# Altium PCB MADI_RP2040_PCB_L4.PcbDoc (part 3 of 3)
Units mm, origin at the board's own origin, x right, y up, seen from the top; angles counter-clockwise.
Board outline 30 x 21.59 mm, 4 copper layers (L1, L2 (GND), L3 (GND), L4), stack 1.525 mm thick; 53 components, 53 nets, 278 pads, 170 vias.
Unrouted connection lines stored in the file: 119.
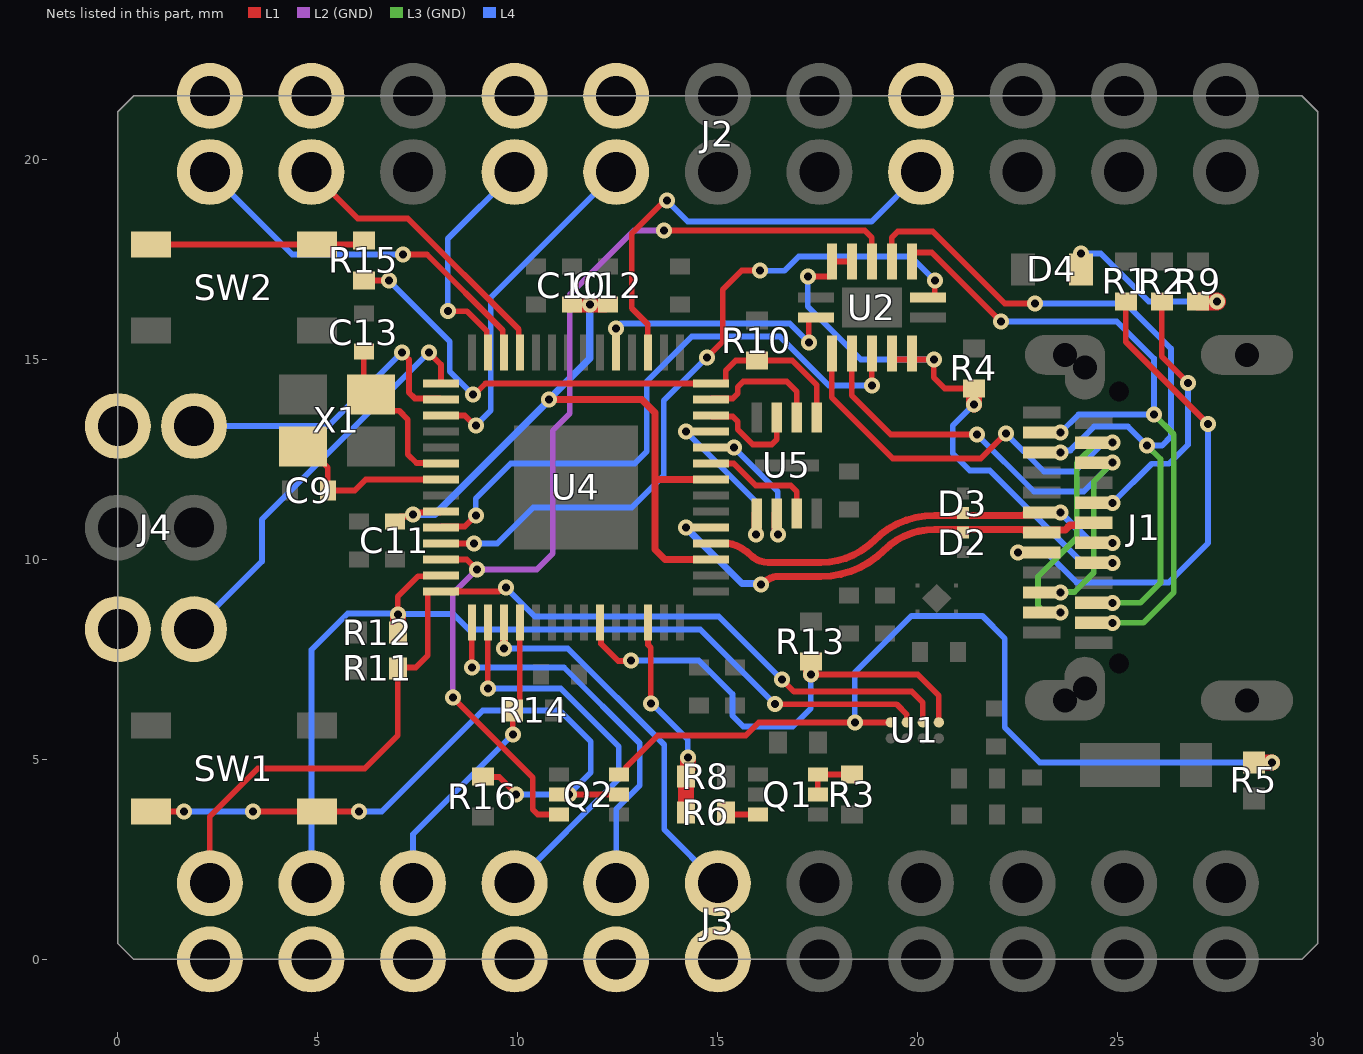
[diagram p4: the nets of this part, all layers, seen from the top]

## Via types
v1: diameter 0.4, hole 0.2, L1 to L4, tented both sides, 161 vias
v2: diameter 0.45, hole 0.2, L1 to L4, tented both sides, 9 vias

## Nets (pads, with @x,y where several pads share a name; then routed paths per layer and width w, separated by ;. In a path a pad name is that pad's centre, name@x,y a point inside that pad or via, vN(x,y) a via of type N, cw(c..) or ccw(c..) an arc to the next point about the centre after c; other vN are vias at no path point) (continued)
GPIO1: J2.4 U4.3 | length 11.4
  L1 w0.146: U4.3@13.25,15.175 13.25,15.881 12.85,16.281 12.85,18.15 13.675,18.975 v1(13.725,18.975)
  L4 w0.146: v1(13.725,18.975) 14.25,18.45 18.845,18.45 J2.4@20.08,19.685
GPIO10: J2.8 U4.13 | length 5.9
  L1 w0.146: v1(8.25,16.205) 8.73,16.205 9.223,15.712 9.223,15.202 U4.13@9.25,15.175
  L4 w0.146: v1(8.25,16.205) 8.25,18.015 J2.8@9.92,19.685
GPIO14: J2.7 U4.17 | length 8.8
  L1 w0.146: U4.17@8.075,13.6 8.675,13.6 8.925,13.35 v1(8.95,13.35)
  L4 w0.146: v1(8.95,13.35) 9.325,13.725 9.325,16.55 J2.7@12.46,19.685
I2C0_SCL: J3.11 R11.1 U1.B1 U4.28 | length 25.5
  L1 w0.146: J3.11@2.3,1.905 2.3,3.575 3.5,4.775 6.175,4.775 7,5.6 R11.1@7,7.275 7.025,7.3 7.45,7.3 7.75,7.6 7.75,9.173 7.777,9.2 U4.28@8.075,9.2 9.531,9.2 9.631,9.3 v1(9.7,9.3) ; v1(16.6,7) 16.901,6.7 19.85,6.7 20.125,6.425 U1.B1@20.125,5.925
  L4 w0.146: v1(9.7,9.3) 10.425,8.575 15.025,8.575 v1(16.6,7)
I2C0_SDA: J3.10 R12.1 U1.C1 U4.27 | length 24.5
  L1 w0.146: v1(7,8.625) 7,9.075 7.504,9.579 7.95,9.579 U4.27@7.971,9.6 ; v1@16.425,6.375 v1(16.43,6.38) 19.47,6.38 19.725,6.125 U1.C1@19.725,5.925
  L1 w0.4: R12.1@7,8.175 v1(7,8.625)
  L4 w0.146: J3.10@4.84,1.905 4.84,7.74 5.75,8.65 6.975,8.65 v1(7,8.625) ; v1@6.988,8.638 8.387,8.638 8.775,8.25 14.56,8.25 v1(16.43,6.38)
MR: Q2.6 R5.2 U1.D1 | length 22.9
  L1 w0.146: Q2.6@12.525,4.625 12.6,4.625 12.702,4.727 12.702,4.802 13.5,5.6 15.7,5.6 16.025,5.925 v1(18.425,5.925) U1.D1@19.325,5.925
  L1 w0.4: R5.2@28.4,4.925 v1(28.85,4.925)
  L4 w0.146: v1(18.425,5.925) 18.425,7.172 19.842,8.589 21.611,8.589 22.175,8.025 22.175,5.8 23.05,4.925 v1(28.85,4.925)
NetC9_1: C9.1 U4.21 X1.1 | length 4.6
  L1 w0.146: X1.1@4.775,12.675 X1.1@4.625,12.825 4.725,12.825 5.25,12.3 C9.1@5.25,11.725 5.925,11.725 6.2,12 U4.21@8.075,12
NetC10_2: C10.2 C11.2 C12.2 U4.23 U4.45 U4.50 | length 18.5
  L1 w0.146: C11.2@6.925,10.95 7.052,11.077 7.326,11.076 v1(7.375,11.125) 7.423,11.173 8.048,11.173 U4.23@8.075,11.2
  L1 w0.18: v1(10.775,14) 13.1,14 13.43,13.67 13.43,12 ; U4.45@14.825,10 13.68,10 13.43,10.25 13.43,12 ; U4.50@14.825,12 13.43,12
  L1 w0.4: C10.2@11.425,16.375 C12.2@12.175,16.375
  L4 w0.18: v1(7.375,11.125) 7.925,11.125 10.775,13.975 v1(10.775,14) 11.8,15.025 v1(11.8,16.375)
NetC13_1: C13.1 U4.20 X1.3 | length 4.1
  L1 w0.146: C13.1@6.15,15.2 6.15,14.3 X1.3@6.325,14.125 ; X1.3@6.325,14.025 6.635,13.715 7.035,13.715 7.25,13.5 7.25,12.625 7.465,12.41 8.065,12.41 U4.20@8.075,12.4
NetD4_A: D4.A R9.2 | length 4.2
  L1 w0.45: R9.2@27,16.45 v1(27.475,16.45)
  L4 w0.146: v1(24.075,17.65) 24.575,17.65 25.775,16.45 v1@27.35,16.45
NetJ1_A5: J1.A5 R1.2 | length 12.4
  L1 w0.146: R1.2@25.2,16.45 25.2,15.441 27.251,13.39 v1(27.256,13.39)
  L4 w0.146: v1(22.506,10.17) 23.226,10.17 23.971,9.425 26.275,9.425 27.256,10.406 v1(27.256,13.39)
NetJ1_B5: J1.B5 R2.2 | length 6.3
  L1 w0.146: R2.2@26.1,16.45 26.1,15.071 v1(26.756,14.415)
  L4 w0.146: v1(24.87,11.415) 25.845,12.39 26.281,12.39 26.756,12.865 v1(26.756,14.415)
NetQ1_3: Q1.3 R6.2 | length 0.8
  L1 w0.146: R6.2@15.2,3.675 15.25,3.625 Q1.3@16,3.625
NetQ1_5: Q1.5 Q1.6 R3.1 | length 1.3
  L1 w0.146: Q1.5@17.5,4.125 Q1.6@17.5,4.625 R3.1@18.35,4.625
NetQ2_2: Q2.2 Q2.5 R16.2 SW1.1 SW1.2 | length 17.5
  L1 w0.146: SW1.2@0.825,3.7 v1(1.65,3.7) ; v1(3.375,3.7) SW1.1@4.975,3.7 v1(6.025,3.7) ; R16.2@9.125,4.575 9.137,4.563 9.537,4.563 9.95,4.15 v1(9.95,4.125) ; v1(11.275,4.125) Q2.5@12.525,4.125
  L4 w0.146: v1(1.65,3.7) v1(3.375,3.7) ; v1(6.025,3.7) 6.6,3.7 9.125,6.225 11.05,6.225 11.825,5.45 11.825,4.675 v1(11.275,4.125) v1(9.95,4.125)
NetR15_2: R15.2 SW2.1 SW2.2 | length 5.4
  L1 w0.146: SW2.1@0.825,17.875 SW2.2@4.975,17.875 6.05,17.875 R15.2@6.15,17.975
nIRQ_BQ: R13.1 U1.A1 U4.37 | length 12.4
  L1 w0.146: U4.37@12.05,8.425 12.077,8.398 12.077,7.892 12.509,7.46 12.81,7.46 v1(12.825,7.475) ; v1(17.325,7.125) 20,7.125 20.525,6.6 U1.A1@20.525,5.925
  L1 w0.4: v1(17.325,7.125) R13.1@17.325,7.45
  L4 w0.146: v1(12.825,7.475) 14.525,7.475 15.363,6.637 15.363,6.099 15.638,5.825 16.875,5.825 17.325,6.275 v1(17.325,7.125)
nRESET_SW: J1.A10 J1.B10 U2.3 | length 19.3
  L1 w0.146: U2.3@19.35,17.45 19.35,18.05 19.5,18.2 20.375,18.2 22.175,16.4 v1(22.925,16.4)
  L3 (GND) w0.146: v1(24.87,8.915) 25.565,8.915 26.066,9.416 26.066,12.51 v1(25.731,12.845)
  L4 w0.146: v1(22.925,16.4) 25.2,16.4 26.326,15.274 26.326,13.064 26.106,12.845 v1(25.731,12.845) 25.256,13.32 24.406,13.32 23.813,12.727 23.622,12.727 v1(23.57,12.675)
QSPI_DATA0: U4.53 U5.5 | length 3.8
  L1 w0.254: v1(15.95,10.625) 15.975,10.65 U5.5@15.975,11.15
  L4 w0.146: v1(14.2,13.2) 15,12.4 15.95,11.45 v1(15.95,10.625)
QSPI_DATA1: U4.55 U5.2 | length 3.2
  L1 w0.146: U4.55@14.825,14 14.85,14.025 15.375,14.025 15.5,14.15 15.5,14.312 15.638,14.45 16.725,14.45 16.975,14.2 U5.2@16.975,13.55
QSPI_DATA2: U4.54 U5.3 | length 2.7
  L1 w0.146: U4.54@14.825,13.6 14.85,13.575 15.375,13.575 15.5,13.45 15.5,13.25 15.875,12.875 16.35,12.875 16.475,13 U5.3@16.475,13.55
QSPI_DATA3: U4.51 U5.7 | length 3
  L1 w0.146: U4.51@14.825,12.4 15.4,12.4 15.95,11.85 16.825,11.85 16.975,11.7 U5.7@16.975,11.15
QSPI_nCS: R10.1 R15.1 U4.56 U5.1 | length 14.5
  L1 w0.146: R15.1@6.15,16.975 v1(6.775,16.975) ; v1(8.875,14.125) 8.917,14.125 9.193,14.4 15.175,14.4 15.2,14.425 15.2,14.725 15.45,14.975 R10.1@15.975,14.975 16.863,14.975 17.475,14.363 U5.1@17.475,13.55
  L4 w0.146: v1(6.775,16.975) 8.3,15.45 8.3,14.7 v1(8.875,14.125)
QSPI_SCK: U4.52 U5.6 | length 3.2
  L1 w0.254: U5.6@16.475,11.15 16.475,10.65 v1(16.5,10.625)
  L4 w0.146: v1(15.4,12.8) 16.5,11.7 v1(16.5,10.625)
RUN_RP: Q2.3 U2.4 U4.26 | length 26.4
  L1 w0.146: U4.26@8.075,10 8.725,10 v1(8.975,9.75) ; v1(8.375,6.55) 10.375,4.55 10.375,3.75 10.5,3.625 Q2.3@11.025,3.625 ; v1(13.65,18.225) 18.675,18.225 18.85,18.05 U2.4@18.85,17.45
  L2 (GND) w0.146: v1(8.375,6.55) 8.375,9.15 v1(8.975,9.75) 10.475,9.75 10.875,10.15 10.875,13.225 11.3,13.65 11.3,16.625 12.9,18.225 v1(13.65,18.225)
SPI0_MISO: J3.6 U4.31 | length 9.7
  L1 w0.2: v1(9.65,7.775) U4.31@9.65,8.425
  L4 w0.146: v1(9.65,7.775) 11.25,7.775 13.659,5.366 13.659,3.246 J3.6@15,1.905
SPI0_MOSI: J3.8 U4.30 | length 10.2
  L1 w0.146: v1(9.25,6.775) U4.30@9.25,8.425
  L4 w0.146: v1(9.25,6.775) 11.075,6.775 12.525,5.325 12.525,4.51 J3.8@9.92,1.905 J3.8@10.054,1.905
SPI0_nCS: J3.9 R14.1 U4.32 | length 7.6
  L1 w0.146: v1(9.875,5.625) 9.875,6.2 R14.1@9.9,6.225 ; R14.1@9.875,6.225 9.875,6.275 10.05,6.45 U4.32@10.05,8.425
  L4 w0.146: J3.9@7.38,1.905 7.38,3.13 v1(9.875,5.625)
SPI0_SCK: J3.7 U4.29 | length 9.9
  L1 w0.146: v1(8.85,7.3) U4.29@8.85,8.425
  L4 w0.146: v1(8.85,7.3) 11.153,7.3 13.05,5.403 13.05,4.35 12.46,3.76 J3.7@12.46,1.905
SW_CONTROL: J1.B8 R4.2 U2.5 U2.6 U2.12 U2.13 | length 15.7
  L1 w0.146: v1(17.25,17.075) 17.8,17.075 17.85,17.125 U2.6@17.85,17.175 ; U2.6@17.85,17.238 U2.6@17.85,17.45 U2.5@18.35,17.45 ; U2.12@19.35,15.15 19.35,15.05 19.4,15 19.8,15 U2.13@19.85,15.05 ; U2.13@19.85,15.15 U2.13@19.85,15.05 ; R4.2@21.4,14.275 20.675,14.275 20.4,14.55 v1(20.4,15) 19.9,15 U2.13@19.85,15.05
  L1 w0.4: v1(21.4,13.875) R4.2@21.4,14.275
  L4 w0.146: v1(17.25,17.075) 17.25,16.325 18.575,15 v1(20.4,15) ; v1(21.4,13.875) 20.875,13.35 20.875,12.65 21.3,12.225 21.8,12.225 24.11,9.915 v1(24.87,9.915)
SWDCLK: U2.11 U4.24 | length 15.3
  L1 w0.146: U4.24@8.075,10.8 8.1,10.825 8.675,10.825 v1(8.95,11.1) ; v1(18.85,14.35) U2.11@18.85,15.15
  L4 w0.146: v1(8.95,11.1) 8.95,11.525 9.825,12.4 12.925,12.4 13.225,12.7 13.225,14.45 14.35,15.575 16.55,15.575 17.775,14.35 v1(18.85,14.35)
SWDCLK_SW: J1.A3 J1.B3 U2.10 | length 12.8
  L1 w0.146: U2.10@18.35,15.15 18.35,14.1 19.325,13.125 v1(21.475,13.125)
  L3 (GND) w0.146: v1(23.57,9.175) 23.579,9.184 23.92,9.184 24.4,9.664 24.4,11.945 v1@24.87,12.415
  L4 w0.146: v1(21.475,13.125) 22.903,11.697 24.147,11.697 v1(24.867,12.418)
SWDIO: U2.1 U4.25 | length 18
  L1 w0.146: U4.25@8.075,10.4 v1(8.9,10.4) ; v1(14.725,15.05) 15.125,15.45 15.125,16.75 15.6,17.225 v1(16.05,17.225) ; U2.1@20.25,16.55 20.375,16.55 20.425,16.6 v1(20.425,16.975)
  L4 w0.146: v1(8.9,10.4) 9.484,10.4 10.384,11.3 12.85,11.3 13.65,12.1 13.65,13.975 v1(14.725,15.05) ; v1(16.05,17.225) 16.058,17.217 16.667,17.217 17.025,17.575 19.825,17.575 v1(20.425,16.975)
SWDIO_SW: J1.A11 J1.B11 U2.2 | length 17.8
  L1 w0.146: U2.2@19.85,17.45 19.85,17.625 19.9,17.675 20.35,17.675 v1(22.075,15.95)
  L3 (GND) w0.146: v1(24.87,8.415) 25.64,8.415 26.4,9.175 26.4,13.126 v1(25.906,13.62)
  L4 w0.146: v1(22.075,15.95) 24.975,15.95 25.906,15.019 ; v1(23.57,13.175) 24.015,13.62 v1(25.906,13.62) 25.906,15.03
SWO: U2.8 U4.5 | length 5.7
  L1 w0.146: v1(17.275,15.425) 17.275,16.025 U2.8@17.3,16.05
  L4 w0.146: v1(12.45,15.775) 12.575,15.9 16.8,15.9 v1(17.275,15.425)
SWO_SW: J1.A2 J1.B2 U2.9 | length 15.4
  L1 w0.146: U2.9@17.85,15.15 17.85,14.05 19.375,12.525 21.575,12.525 v1(22.2,13.15)
  L3 (GND) w0.146: v1(23.57,8.675) 23.176,8.675 23.006,8.845 23.006,9.57 23.975,10.539 23.975,12.414 24.481,12.92 24.865,12.92 v1@24.87,12.915
  L4 w0.146: v1(22.2,13.15) 23.153,12.197 23.922,12.197 24.604,12.879 24.829,12.879 v1(24.867,12.918)
UART0_RX: J4.3 U4.16 | length 7.9
  L1 w0.147: v1(7.1,15.175) 7.275,15 7.275,14.175 7.423,14.027 8.048,14.027 U4.16@8.075,14
  L4 w0.146: J4.3@1.905,13.335 5.26,13.335 v1(7.1,15.175)
UART0_TX: J4.1 U4.15 | length 10.7
  L1 w0.147: v1(7.775,15.175) 8.075,14.875 U4.15@8.075,14.4
  L4 w0.146: J4.1@1.225,8.35 J4.1@1.55,8.675
  L4 w0.147: J4.1@1.905,8.255 3.6,9.95 3.6,11 v1(7.775,15.175)
UART1_RX: J2.11 U4.12 | length 9.5
  L1 w0.146: v1(7.13,17.625) 7.729,17.625 9.623,15.731 9.623,15.202 U4.12@9.65,15.175
  L4 w0.146: J2.11@2.3,19.685 4.36,17.625 v1(7.13,17.625)
UART1_TX: J2.10 U4.11 | length 7.4
  L1 w0.146: J2.10@4.84,19.685 6,18.525 7.25,18.525 10.023,15.752 10.023,15.202 U4.11@10.05,15.175
USB_D_N: D3.1 J1.A7 J1.B7 U4.46 | length 10.4
  L1 w0.18: U4.46@14.825,10.4 15.198,10.4 cw(c15.198,9.743) 15.45,10.35 cw(c14.977,9.208) 15.849,10.084 ccw(c15.975,10.213) 15.854,10.08 ccw(c16.256,10.525) 15.885,10.053 ccw(c16.256,10.525) 16.257,9.925 17.581,9.925 ccw(c17.581,11.794) 18.903,10.472 cw(c20.417,8.958) 20.417,11.1 22.615,11.1 22.627,11.113 23.038,11.113 J1.A7@23.1,11.175
  L4 w0.18: v1(23.57,11.175) 24.33,10.415 v1(24.87,10.415)
USB_D_P: D2.1 J1.A6 J1.B6 U4.47 | length 11.3
  L1 w0.18: v1(16.075,9.375) cw(c16.188,9.235) 16.108,9.396 16.152,9.418 ccw(c16.072,9.579) 16.193,9.447 cw(c16.519,9.096) 16.519,9.575 17.581,9.575 ccw(c17.581,11.794) 19.15,10.225 cw(c20.417,8.958) 20.417,10.75 20.445,10.75 20.6,10.75 22.615,10.75 22.627,10.737 23.038,10.737 J1.A6@23.1,10.675 23.162,10.737 23.684,10.737 23.799,10.853 24.338,10.853 J1.B6@24.4,10.915
  L4 w0.18: v1(14.2,10.8) 15.605,9.395 16.055,9.395 v1(16.075,9.375)
VBAT_MON: R6.1 R8.2 U4.40 | length 5.2
  L1 w0.146: U4.40@13.25,8.425 13.259,8.416 13.259,7.866 13.325,7.8 v1(13.325,6.4)
  L1 w0.4: R6.1@14.2,3.625 14.2,4.525 14.225,4.55 14.225,4.767 14.25,4.792 v1@14.25,5
  L4 w0.146: v1(13.325,6.4) 13.35,6.4 14.25,5.5 v1(14.25,5.05)
pads on no net: J1.0 J1.A8 U4.4 U4.6 U4.7 U4.8 U4.9 U4.14 U4.18 U4.34 U4.35 U4.41 U5.9

## Polygon pours and split planes (outlines as drawn)
NetC10_2 on L1 "NONET_L-01_P-001" (solid, remove dead copper, pour order 35): 13.675,12 13.45,11.775 13.45,12.225
+3V3 on L1 "NONET_L-01_P-001" (solid, remove dead copper, pour order 34): 10.45,9.625 10.225,9.85 10.675,9.85
+3V3 on L1 "NONET_L-01_P-001" (solid, remove dead copper, pour order 33): 9.3,11.6 9.525,11.825 9.525,11.35
NetC10_2 on L1 "NONET_L-01_P-001" (solid, remove dead copper, pour order 32): 6.675,10.75 6.675,11.15 6.825,11.3 8.525,11.3 8.525,11.1 7.65,11.1 7.3,10.75 7.175,10.75
+3V3 on L1 "NONET_L-01_P-001" (solid, remove dead copper, pour order 30): 0.325,5.525 5.475,5.525 6.225,6.275 6.225,8.45 5.65,8.45 5.375,8.725 5.375,10.5 5.625,10.75 6.275,10.75 6.375,10.85 6.375,11.225 6.65,11.5 8.525,11.5 8.525,11.7 6.325,11.7 5.775,11.15 5.325,11.15 4.675,10.5 4.675,6.65 4.2,6.175 0.325,6.175
+3V3 on L1 "NONET_L-01_P-001" (solid, remove dead copper, pour order 29): 14.125,11.7 13.95,11.525 13.95,11.225 14.075,11.1 15.45,11.1 15.6,11.25 15.6,11.55 15.45,11.7
+3V3 on L1 "NONET_L-01_P-001" (solid, remove dead copper, pour order 28): 20.265,9.37 20.265,9.48 19.92,9.825 19.345,9.825 18.82,9.3 17.5,9.3 17.1,8.9 15.675,8.9 15.275,9.3 15.275,9.7 13.6,9.7 13.5,9.6 13.95,9.15 13.95,7.975 14.275,7.65 14.275,7.1 15.675,7.1 15.675,7.875 16.025,8.225 17.6,8.225 17.6,8.475 18.025,8.9 19.795,8.9 20.115,9.22
GND on L1 "NONET_L-01_P-001" (solid, remove dead copper, pour order 27): 10.775,4.45 10.775,5.35 11.325,5.9 11.325,7.375 11.725,7.375 11.775,7.325 11.775,4.825 11.4,4.45 11.275,4.45
GND on L1 "NONET_L-01_P-001" (solid, remove dead copper, pour order 26): 4.025,13.625 3.825,13.825 3.825,16.125 4.3,16.6 5.65,16.6 6.3,15.95 5.9,15.95 5.475,15.525 5.475,15.4 5.225,15.15 5.225,13.625
GND on L1 "NONET_L-01_P-001" (solid, remove dead copper, pour order 25): 5.775,10.2 5.775,9.25 5.85,9.175 6.75,9.175 7.175,9.6 7.175,10.2
nIRQ_BQ on L1 "NONET_L-01_P-001" (solid, remove dead copper, pour order 17): 17.6,7.675 17.6,7.225 17.7,7.125 17.325,7.125 17.325,7.675
GND on L1 "NONET_L-01_P-001" (solid, remove dead copper, pour order 15): 20.306,8.488 20.306,7.985 20.265,7.944 19.875,8.334 19.875,8.83 19.912,8.83 20.475,9.393 20.843,9.025
GND on L1 "NONET_L-01_P-001" (solid, remove dead copper, pour order 13): 8.688,3.8 8.45,3.8 8.35,3.7 8.35,3 8.5,2.85 9.05,2.85 9.4,3.2 9.4,3.8
+VSYS on L1 "NONET_L-01_P-001" (solid, remove dead copper, pour order 12): 21.211,9.65 21.25,9.611 21.25,8.375 21.25,7.1 21.2,7.05 20.85,7.05 20.8,7.1 20.8,8.35 20.685,8.465 20.685,8.68 20.835,8.83 20.835,9.22 20.685,9.37 20.685,9.585 20.75,9.65
GND on L1 "NONET_L-01_P-001" (solid, remove dead copper, pour order 11): 18.025,8.35 18.025,7.675 18.27,7.43 20.25,7.43 20.25,7.93 20.265,7.944 20.265,8.68 20.115,8.83 19.875,8.83 19.875,8.488 19.737,8.35
+VBUS on L1 "NONET_L-01_P-001" (solid, remove dead copper, pour order 9): 23.938,9.567 23.93,9.56 23.93,9.262 25.267,9.262 25.95,8.58 25.95,5.875 26.55,5.275 26.55,4.425 27.35,4.425 27.35,5.625 26.85,6.125 26.85,11.375 26.158,12.067 23.893,12.067 23.898,12.062 23.898,11.762 25.567,11.762 25.95,11.38 25.95,9.905 25.612,9.567
GND on L1 "NONET_L-01_P-001" (solid, remove dead copper, pour order 8): 22.681,13.975 22.381,13.675 22.534,13.523 23.67,13.523 23.93,13.263 24.87,13.263 24.87,13.567 24.681,13.756 24.681,15.113 22.681,15.113
GND on L1 "NONET_L-01_P-001" (solid, remove dead copper, pour order 7): 26.375,17.225 24.925,17.225 24.925,17.675 25.3,18.05 26,18.05 26.375,17.675
GND on L1 "NONET_L-01_P-001" (solid, remove dead copper, pour order 6): 22.63,7.76 22.63,8.327 23.57,8.327 23.83,8.067 24.87,8.067 24.87,7.762 24.684,7.577 24.684,6.114 24.525,5.955 21.325,5.955 21.225,6.055 21.225,6.355
GND on L1 "NONET_L-01_P-001" (solid, remove dead copper, pour order 4): 22.175,4.775 22.175,4.225 22.6,3.8 23.1,3.8 23.445,3.455 23.445,1.905 21.795,1.905 21.775,1.925 21.775,4.775
+VIN_5V0 on L1 "NONET_L-01_P-001" (solid, remove dead copper, pour order 3): 24.55,3.725 25.175,3.725 25.65,3.25 26.05,3.65 26.05,5.405 25.815,5.64 20.525,5.64 20.525,5.41 20.915,5.41 21.325,5 22.35,5 22.6,4.75 22.6,4.35 23.925,4.35
+VBAT on L1 "NONET_L-01_P-001" (solid, remove dead copper, pour order 2): 19.125,2.035 19.125,3.05 18.775,3.4 17.3,3.4 17.25,3.45 17.25,3.8 17.3,3.85 19.175,3.85 19.61,4.285 19.61,5.525 19.84,5.525 19.84,4.285 20.25,3.875 21.225,3.875 21.225,2.225 20.905,1.905 19.255,1.905
GND on L1 "NONET_L-01_P-001" (solid, remove dead copper, pour order 1): 18.85,5 18.85,4.375 18.95,4.275 19.325,4.275 19.44,4.39 19.44,5.525 19.325,5.64 18.665,5.64 18.575,5.55 18.575,5.275
+VSYS on L1 "NONET_L-01_P-001" (solid, remove dead copper, pour order 0): 21.225,4.825 21.075,4.975 20.75,4.975 20.24,5.485 20.24,5.525 20.01,5.525 20.01,4.44 20.175,4.275 21.225,4.275
+3V3 on L4 "NONET_L-01_P-001" (solid, remove dead copper, pour order 22): 19.675,13.175 19.625,13.225 19.075,12.675 19.075,11.869 18.829,11.622 18.8,11.622 18.8,10.575 18.411,10.186 15.889,10.186 15.55,10.525 15.55,11.4 15.35,11.6 14.2,11.6 14.2,11.2 14.45,11.2 15.825,9.825 16.675,9.825 17.6,8.9 18.725,8.9 19.05,8.9 19.675,9.525
+VSYS on L4 "NONET_L-01_P-001" (solid, remove dead copper, pour order 10): 20.175,5.05 20.175,4.1 20.55,3.725 23.375,3.725 24.335,2.765 24.335,1.905 25.985,1.905 25.985,3.04 24.75,4.275 20.9,4.275 20.575,4.6 20.575,5.05
GND on L2 (GND) "NONET_L-01_P-001" (solid, remove dead copper, pour order 23): -2,24 -2,-3 33,-3 33,24
GND on L3 (GND) "NONET_L-01_P-001" (solid, remove dead copper, pour order 24): -2,24 -2,-3 33,-3 33,24

## Keep-outs
Keep-Out Layer:
  text ".Layer_Name" at 22,-15.5 h1.52

## Other copper
L1:
  rectangle net GND: 21.55,5.955 22.325,6.25
  text ".Layer_Name" at 22,-15.5 h1.52
L2 (GND):
  text ".Layer_Name" at 22,-15.5 h1.52
L3 (GND):
  text ".Layer_Name" at 22,-15.5 h1.52
L4:
  text ".Layer_Name" at 22,-15.5 h1.52

## Silkscreen, mask and mechanical layers (free items; w line width, h text height)
Top Overlay:
  region: 115.3,51.8
  text ".VersionRevision" at 27.973,16.372 h1.5
  text ".Layer_Name" at 22,-15.5 h1.52
Bottom Overlay:
  text "RX" at 1.746,16.775 h1.5 r270
  text "TX" at 4.286,16.75 h1.5 r270
  text "IO1" at 19.526,16.724 h1.5 r270
  text "IO0" at 22.066,16.144 h1.5 r270
  text "GND" at 24.606,15.94 h1.5 r270
  text "3V3" at 27.146,15.94 h1.5 r270
  text "BOOT" at 0.575,15.838 h1.5 r180
  text "IO10" at 9.366,15.84 h1.5 r270
  text "GND" at 6.826,15.822 h1.5 r270
  text "IO14" at 11.906,15.824 h1.5 r270
  text "ADC1" at 14.446,15.403 h1.5 r270
  text "ADC0" at 16.986,15.242 h1.5 r270
  text "IO13" at 2.991,13.856 h1.5 r180
  text "GND" at 2.991,11.317 h1.5 r180
  text "IO12" at 2.991,8.777 h1.5 r180
  text "RP2040" at 6.925,7.994 h2.5 r270
  text "`" at 9.743,7.201 h15 r270
  text "RST" at 0.668,6.888 h1.5 r180
  text "SCL" at 1.871,3.1 h1.5 r270
  text "SDA" at 4.412,3.1 h1.5 r270
  text "nCS" at 6.951,3.1 h1.5 r270
  text "MOSI" at 9.492,3.101 h1.5 r270
  text "SCK" at 12.031,3.1 h1.5 r270
  text "MISO" at 14.572,3.101 h1.5 r270
  text "GND" at 16.998,3 h1.5 r270
  text "BAT" at 19.551,3 h1.5 r270
  text "GND" at 22.078,3 h1.5 r270
  text "SYS" at 24.618,3 h1.5 r270
  text "VIN" at 27.159,3 h1.5 r270
  text ".Layer_Name" at 22,-15.5 h1.52
Top Paste:
  text ".Layer_Name" at 22,-15.5 h1.52
Bottom Paste:
  text ".Layer_Name" at 22,-15.5 h1.52
Top Solder:
  text ".Layer_Name" at 22,-15.5 h1.52
Bottom Solder:
  text ".Layer_Name" at 22,-15.5 h1.52
Drill Guide:
  text ".Layer_Name" at 22,-15.5 h1.52
Board Outline:
  the board outline again, w0
  text ".Layer_Name" at 22,-15.5 h1.52
Top Assembly:
  text "COMPONENTS MARKED 'DNP' SHOULD NOT BE POPULATED." at 0,-7.001 h1.52
  text ".Layer_Name" at 22,-15.5 h1.52
Bottom Assembly:
  text "COMPONENTS MARKED 'DNP' SHOULD NOT BE POPULATED." at 131,-7.001 h1.52
  text ".Layer_Name" at 22,-15.5 h1.52
Top Courtyard:
  text ".Layer_Name" at 22,-15.5 h1.52
Bottom Courtyard:
  text ".Layer_Name" at 22,-15.5 h1.52
Top 3D Body:
  text ".Layer_Name" at 22,-15.5 h1.52
Bottom 3D Body:
  text ".Layer_Name" at 22,-15.5 h1.52
Top Designator:
  text ".Layer_Name" at 22,-15.5 h1.52
Bottom Designator:
  text ".Layer_Name" at 22,-15.5 h1.52
Gerber Information:
  lines w0.1: 0,-17 111,-17 ; 0,-12.5 131,-12.5 ; 55,-21.5 55,-8 ; 111,-21.5 111,-8 ; 0,-21.5 0,-8 131,-8 131,-21.5 0,-21.5
  text "ALL ARTWORK VIEWED FROM TOP SIDE" at 2,-11 h1.52
  text "PRJ TITLE =" at 57.5,-11 h1.52
  text ".Project" at 76,-11 h1.52
  text "REV =" at 113,-11 h1.52
  text ".VersionRevision" at 122.5,-11 h1.52
  text "LAYER NAME =" at 2,-15.5 h1.52
  text "PRJ # =" at 57.5,-15.5 h1.52
  text ".ProjectNumber" at 70,-15.5 h1.52
  text "DRAWN BY" at 113,-15.5 h1.52
  text ".DrawnBy" at 115.5,-19.5 h1.52
  text "CONTACT =" at 2,-20 h1.52
  text ".Contact" at 17.5,-20 h1.52
  text "GENERATED =" at 57.5,-20 h1.52
  text ".Print_Date" at 76.5,-20 h1.52
  text ".Print_Time" at 94,-20 h1.52
Fab Notes:
  lines w0.2: -0.02,16.535 -1.32,16.535 0,17.855 0,8.255 ; 2.3,0 33.605,0 32.285,1.32 32.285,0.02 ; 2.3,21.59 33.605,21.59 32.285,22.91 32.285,21.61 ; 34.595,10.895 34.595,12.195 33.275,10.875 57.575,10.875
  lines w2.5: 31.25,5.795 31.25,15.795
  text "TYPE;" at 103.325,125.325 h2.54
  text "Impedance;" at 116.026,125.243 h2.54
  text "Layer (Reference);" at 136.346,125.133 h2.54
  text "Width (um);" at 171.906,125.133 h2.54
  text "Gap (um);" at 194.765,125.133 h2.54
  text "146;" at 171.905,122.778 h2.54
  text "SE;" at 103.325,122.765 h2.54
  text "50 ohm;" at 116.025,122.703 h2.54
  text "L1(L2), L4(L3);" at 136.346,122.593 h2.54
  text "DIFF;" at 103.326,120.285 h2.54
  text "180;" at 171.905,120.265 h2.54
  text "170;" at 194.805,120.265 h2.54
  text "90 ohm;" at 116.026,120.203 h2.54
  text "L1(L2), L4(L3);" at 136.346,120.093 h2.54
  text "Files / *.GTO - Top Overlay; / *.GTP - Top Paste; / *.GTS - Top Solder; / *.GTL - L1; / *.G1 - L2; / *.G2  - L3; / *.GBL - L4; / *.GBS - Bottom Solder; / *.GBP - Bottom Paste; / *.GBO - Bottom Overlay; / *.GM1 - Board Outline; / *.GM12 - Fab Notes; / *.GD1 - Drill Drawing; / *.GG1 - Drill Guide; /  / Layer Stack Table: JLC3313" at 0,112.395 h2.54
  text "BOARD INFORMATION /  / Minimum Track: 146um; / Minimum Gap: 100um; / Minimum Through Hole VIA: 0.20mm (drill). Drilling: L1-L4 /  / 1. REMOVE ALL NON-FUNCTIONAL INNER LAYER PADS. /  / 2. THIS BOARD CONTAINS IMPEDANCE CONTROLLED TRACKS, TRACK AND GAP SIZES ARE AS FOLLOWS: /  /  /  /  /  /  /  / 3. FINISHED PANEL THICKNESS IS NOT CRITICAL: TO BE APPROXIMATELY 1.6mm /  / 4. SURFACE FINISH: Immersion Gold (ENIG) /  / 5. SOLDER RESIST: APPLY TO BOTH SIDES COLOR - MATT BLACK /  / 6. COMPONENT IDENT: COLOR TO BE WHITE /  / 7. PANEL BY PCB MANUFACTURER" at 100,94.152 h2.54
  text "Castellated edges" at 34.035,21.671 h1.52
  text "Castellated edges" at -0.081,18.285 h1.52 r90
  text "This slot must be in a panel design." at 35.775,11.561 h1.52
  text "Castellated edges" at 34.035,0.081 h1.52
  text ".Layer_Name" at 22,-15.5 h1.52
Drill Drawing:
  circle w0.254: c2.556,73.172 r0.847
  lines w0.254: 1.709,60.895 3.403,60.895 3.403,62.588 1.709,62.588 1.709,60.895 ; 1.709,65.128 2.133,65.128 2.556,64.705 2.979,65.128 3.403,65.128 2.979,65.552 3.403,65.975 2.979,65.975 2.556,66.398 2.133,65.975 1.709,65.975 2.133,65.552 1.709,65.128 ; 1.709,70.208 3.403,70.208 2.556,68.515 1.709,70.208 ; 1.709,76.135 2.556,76.558 3.403,76.135 2.979,76.982 3.403,77.828 2.556,77.405 1.709,77.828 2.133,76.982 1.709,76.135 ; 1.709,80.368 2.133,80.368 2.133,79.945 2.979,79.945 2.979,80.368 3.403,80.368 3.403,81.215 2.979,81.215 2.979,81.638 2.133,81.638 2.133,81.215 1.709,81.215 1.709,80.368
  lines w0.381: 0.191,59.752 196.529,59.752 ; 0.191,82.612 196.529,82.612 ; 14.183,55.942 14.183,86.422 ; 29.419,55.942 29.419,86.422 ; 57.351,55.942 57.351,86.422 ; 70.2,55.942 70.2,86.422 ; 88.838,55.942 88.838,86.422 ; 119.056,55.942 119.056,86.422 ; 134.038,55.942 134.038,86.422 ; 152.981,55.942 152.981,86.422 ; 0.191,55.942 196.529,55.942 196.529,86.422 0.191,86.422 0.191,55.942
  text "Symbol" at 2.476,83.755 h1.83
  text "Count" at 15.326,83.755 h1.83
  text "Hole Size" at 30.562,83.755 h1.83
  text "Plated" at 58.494,83.755 h1.83
  text "Hole Type" at 71.343,83.755 h1.83
  text "Drill Layer Pair" at 89.981,83.755 h1.83
  text "Via/Pad" at 120.199,83.755 h1.83
  text "Pad Shape" at 135.181,83.755 h1.83
  text "Template" at 154.124,83.755 h1.83
  text "170" at 15.326,79.945 h1.52
  text "0.200mm (7.87mil)" at 30.562,79.945 h1.52
  text "PTH" at 58.494,79.945 h1.52
  text "Round" at 71.343,79.945 h1.52
  text "L1 - L4" at 89.981,79.945 h1.52
  text "Via" at 120.199,79.945 h1.52
  text "Rounded" at 135.181,79.945 h1.52
  text "(Mixed)" at 154.124,79.945 h1.52
  text "2" at 15.326,76.135 h1.52
  text "0.500mm (19.69mil)" at 30.562,76.135 h1.52
  text "NPTH" at 58.494,76.135 h1.52
  text "Round" at 71.343,76.135 h1.52
  text "L1 - L4" at 89.981,76.135 h1.52
  text "Pad" at 120.199,76.135 h1.52
  text "Rounded" at 135.181,76.135 h1.52
  text "c0hn50m55" at 154.124,76.135 h1.52
  text "2" at 15.326,72.325 h1.52
  text "0.600mm (23.62mil)" at 30.562,72.325 h1.52
  text "PTH" at 58.494,72.325 h1.52
  text "Slot" at 71.343,72.325 h1.52
  text "L1 - L4" at 89.981,72.325 h1.52
  text "Pad" at 120.199,72.325 h1.52
  text "Rounded" at 135.181,72.325 h1.52
  text "(Mixed)" at 154.124,72.325 h1.52
  text "2" at 15.326,68.515 h1.52
  text "0.600mm (23.62mil)" at 30.562,68.515 h1.52
  text "PTH" at 58.494,68.515 h1.52
  text "Slot" at 71.343,68.515 h1.52
  text "L1 - L4" at 89.981,68.515 h1.52
  text "Pad" at 120.199,68.515 h1.52
  text "Rounded" at 135.181,68.515 h1.52
  text "(Mixed)" at 154.124,68.515 h1.52
  text "2" at 15.326,64.705 h1.52
  text "0.600mm (23.62mil)" at 30.562,64.705 h1.52
  text "PTH" at 58.494,64.705 h1.52
  text "Slot" at 71.343,64.705 h1.52
  text "L1 - L4" at 89.981,64.705 h1.52
  text "Pad" at 120.199,64.705 h1.52
  text "Rounded" at 135.181,64.705 h1.52
  text "r230_100h60_190r100m235_105" at 154.124,64.705 h1.52
  text "50" at 15.326,60.895 h1.52
  text "1.000mm (39.37mil)" at 30.562,60.895 h1.52
  text "PTH" at 58.494,60.895 h1.52
  text "Round" at 71.343,60.895 h1.52
  text "L1 - L4" at 89.981,60.895 h1.52
  text "Pad" at 120.199,60.895 h1.52
  text "Rounded" at 135.181,60.895 h1.52
  text "c165h100" at 154.124,60.895 h1.52
  text "228 Total" at 15.326,57.085 h1.52
  text "Slot definitions :" at 2.476,53.403 h1.52
  text "Routed Path Length" at 28.707,53.403 h1.52
  text "= Calculated from tool start centre position to tool end centre position." at 56.715,53.403 h1.52
  text "Hole Length" at 28.707,50.863 h1.52
  text "= Routed Path Length + Tool Size = Slot length as defined in the PCB layout" at 46.304,50.863 h1.52
  text ".Layer_Name" at 22,-15.5 h1.52

## Dimensions
0,21.19 to 30,21.19 on Dimensions
0.4,0 to 0.4,21.59 on Dimensions